# Altium PCB LED_RGBSwitch_AD.pcbdoc
Units mil, origin at the board's own origin, x right, y up, seen from the top; angles counter-clockwise.
Board outline 7770 x 7965 mil, 2 copper layers (Top Layer, Bottom Layer); 140 components, 163 nets, 579 pads, 138 vias.
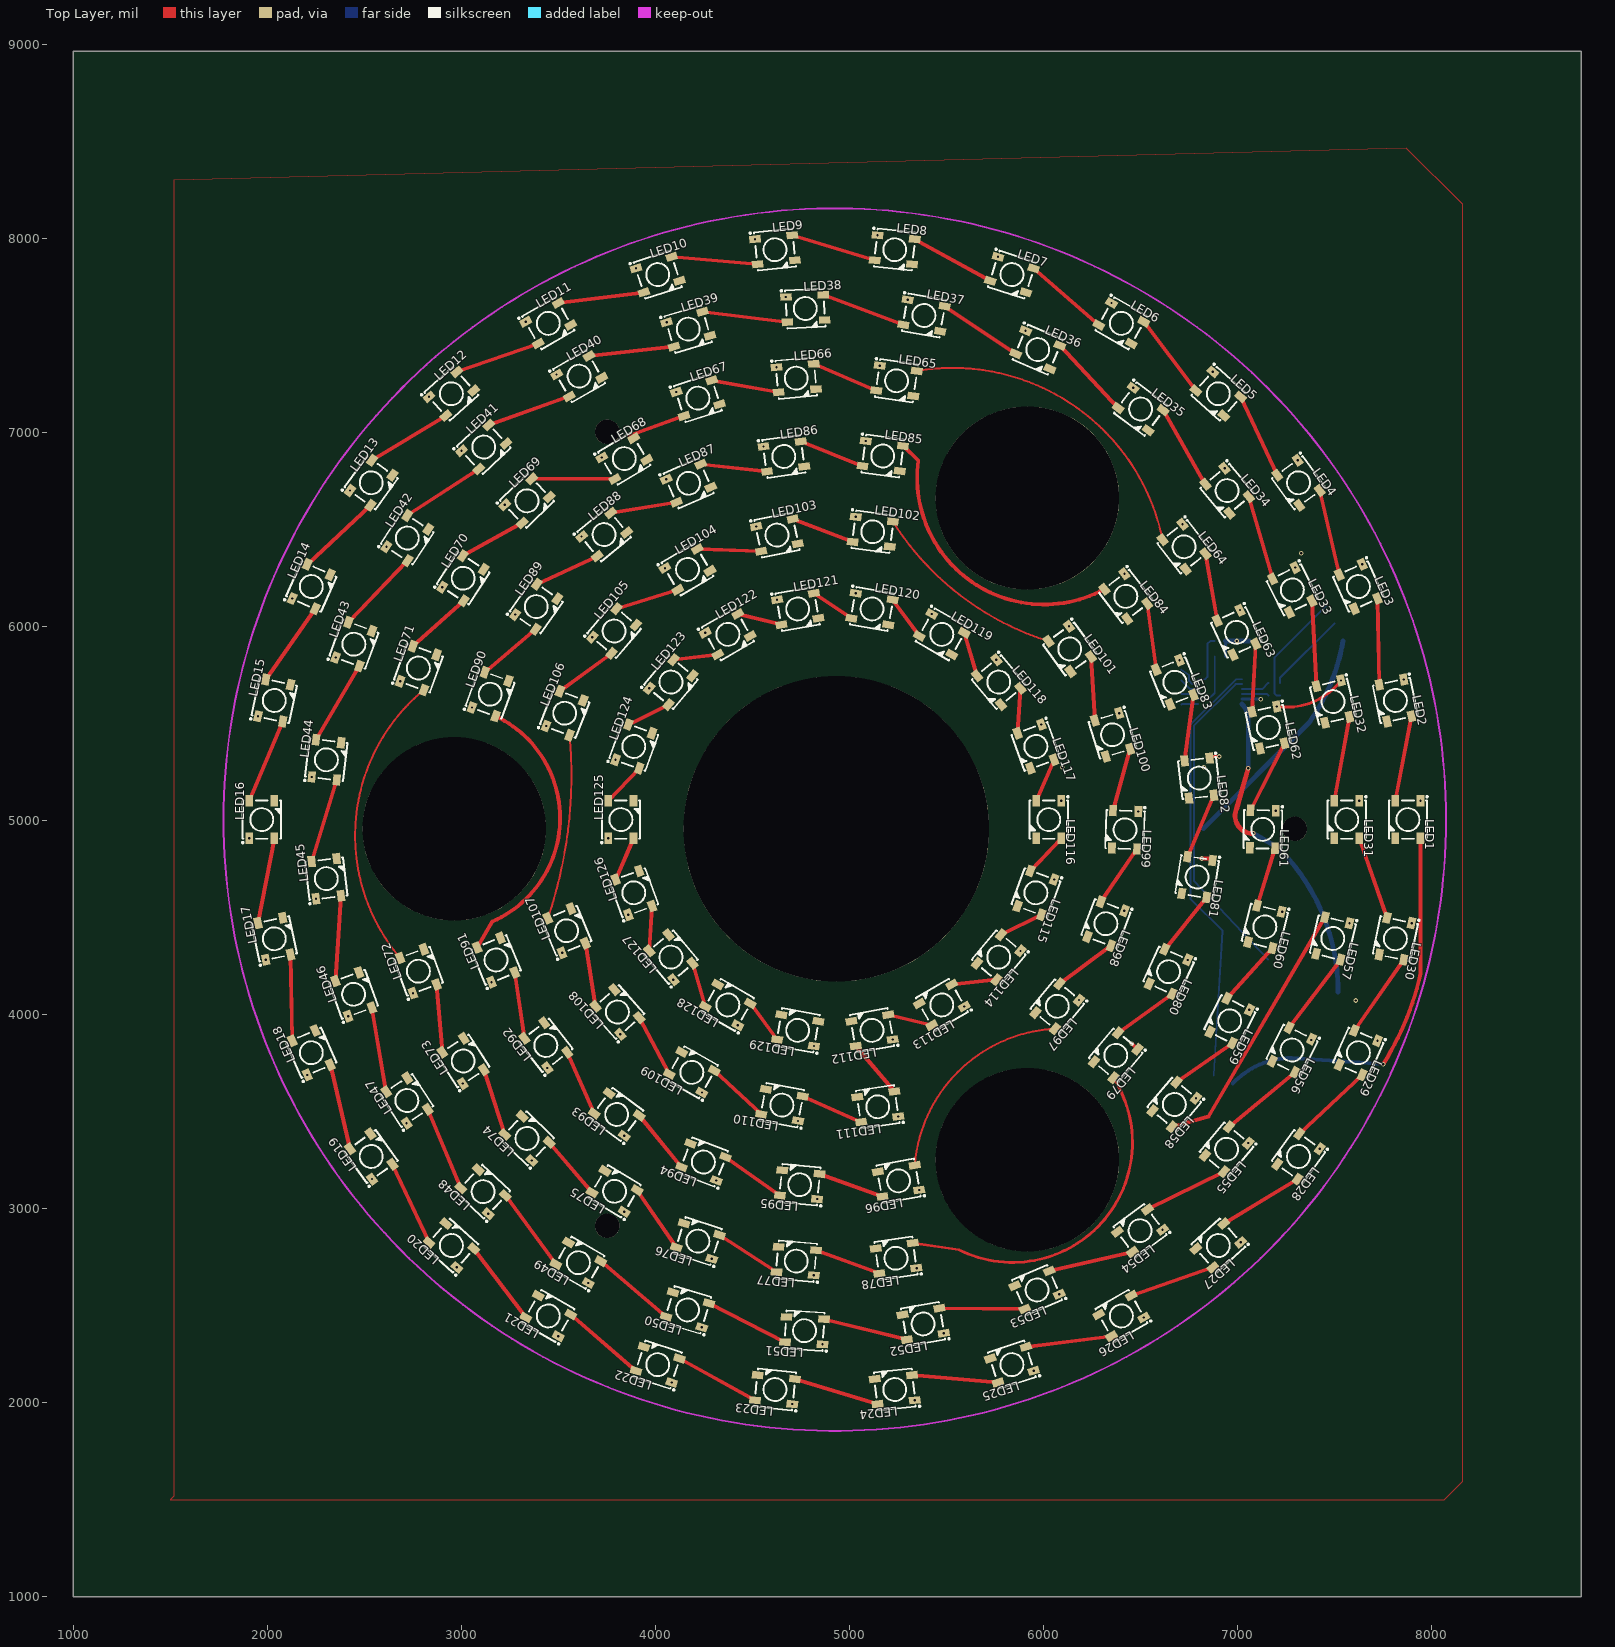
[diagram p0: Top Layer view]
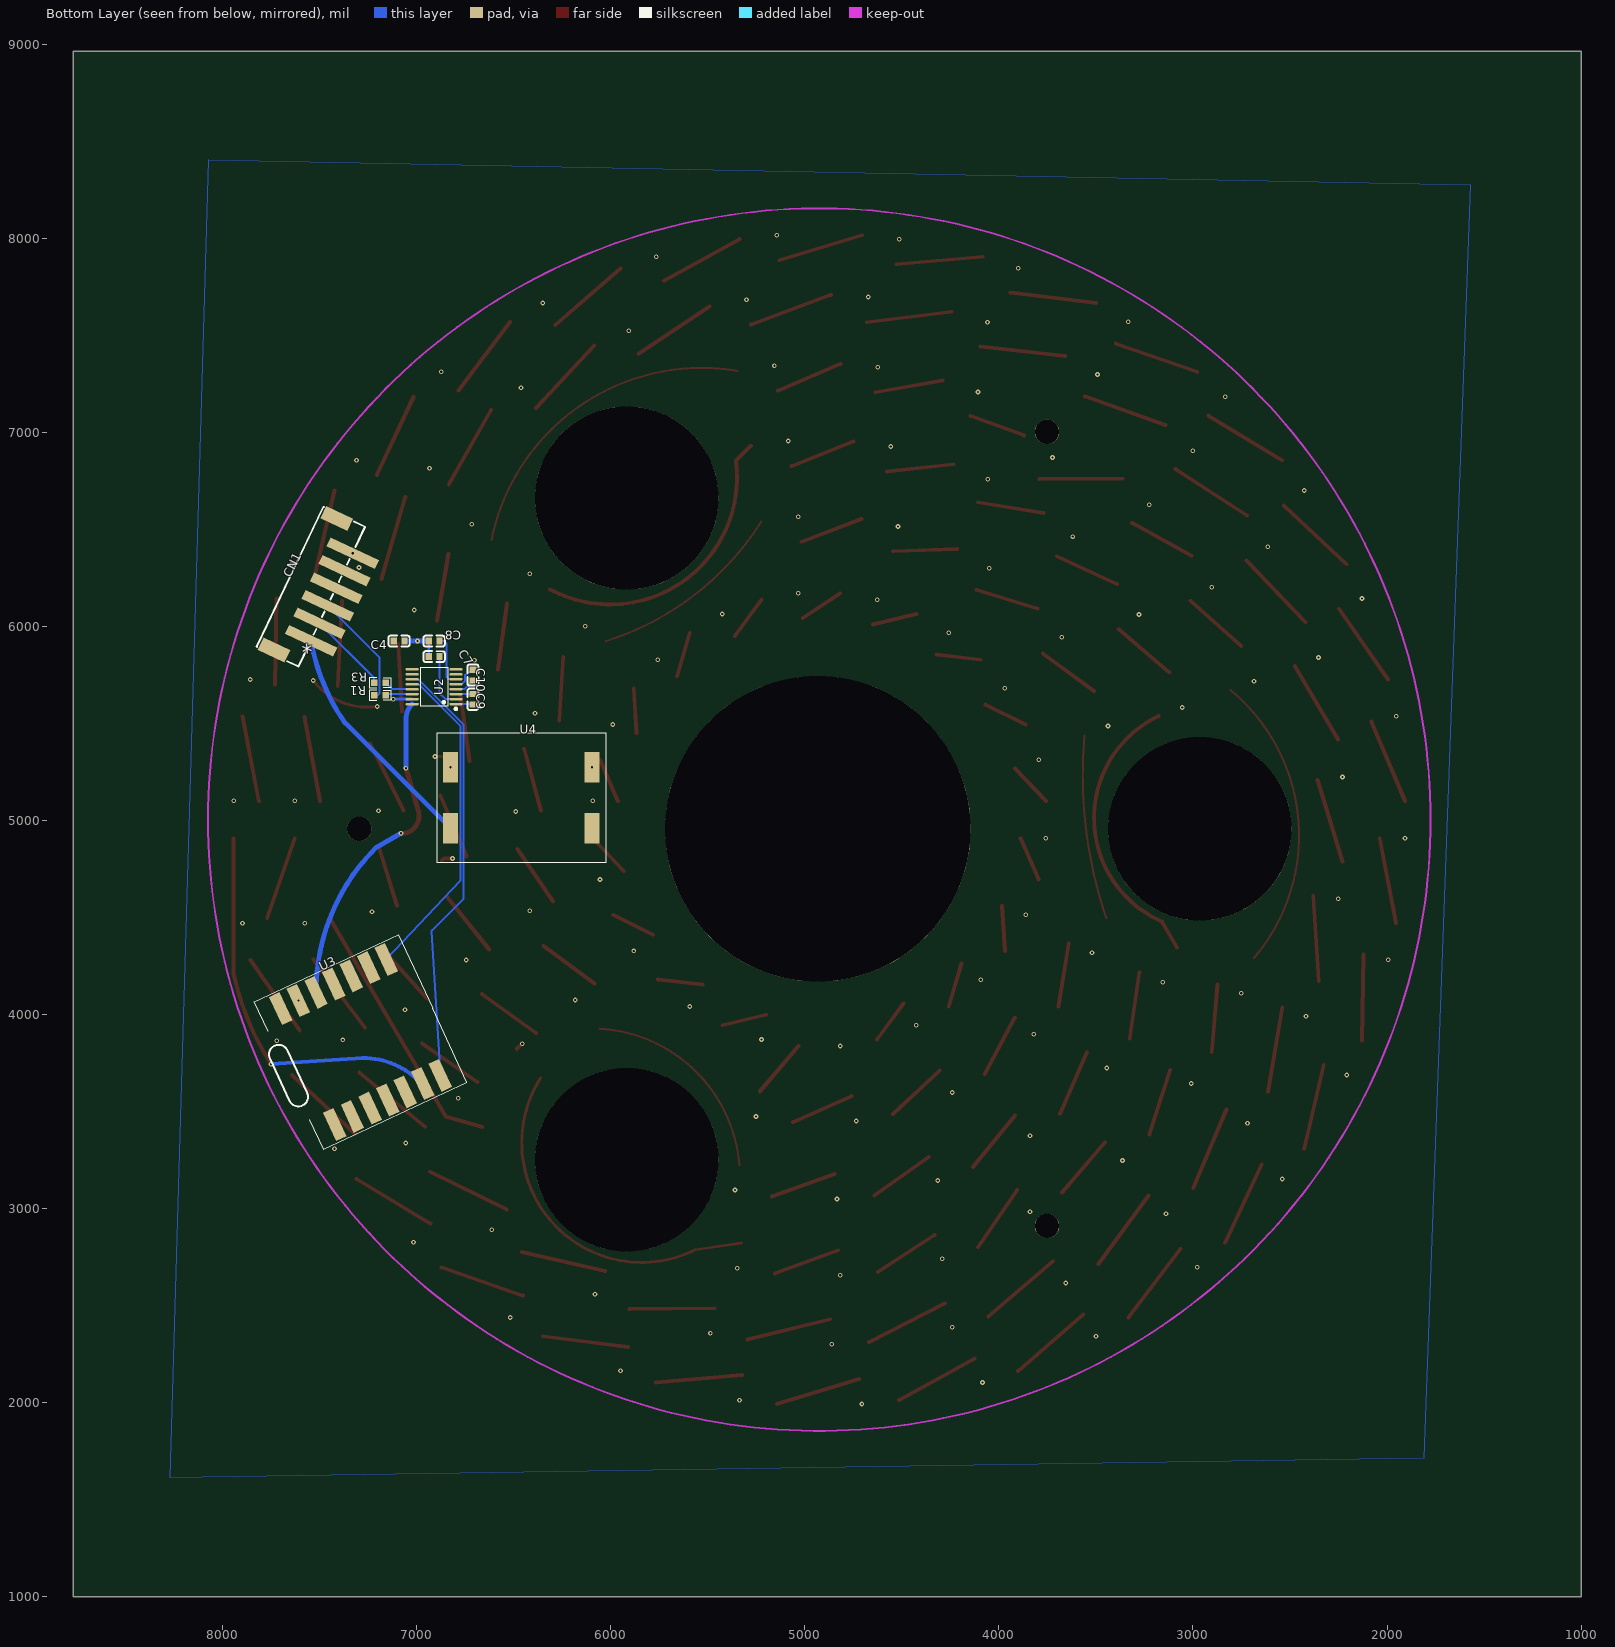
[diagram p1: Bottom Layer view, seen from below]

## Layer stack, top to bottom
Top Layer: signal copper (thickness not stored)
Dielectric: dielectric 12.6, FR-4, Dk 4.8
Bottom Layer: signal copper (thickness not stored)

## Board outline
8770,1000 1000,1000 1000,8965 8770,8965

## Components (designator, comment, footprint, x,y, rotation, side; value= is the part's Value field where it differs from the comment)
C4 "1u" C0603 7090,5925 r0 bottom
C7 "1u" C0603 6910,5845 r180 bottom
C8 "1u" C0603 6910,5925 r180 bottom
C9 "1u" C0603 6710,5625 r90 bottom
C10 "1u" C0603 6710,5750 r90 bottom
CN1 "XH2.54-6AB" CONN-SMD_6P-P2.54_XH2.54-6AB 7504.37,6184.96 r295.5 bottom
LED1 "WS2812B-B" LED-SMD_4P-L5.0-W5.0-TL_WS2812B-B 7877.76,5005 r270 top
LED2 "WS2812B-B" LED-SMD_4P-L5.0-W5.0-TL_WS2812B-B 7813.23,5618.91 r282 top
LED3 "WS2812B-B" LED-SMD_4P-L5.0-W5.0-TL_WS2812B-B 7622.48,6205.99 r294 top
LED4 "WS2812B-B" LED-SMD_4P-L5.0-W5.0-TL_WS2812B-B 7313.83,6740.59 r306 top
LED5 "WS2812B-B" LED-SMD_4P-L5.0-W5.0-TL_WS2812B-B 6900.78,7199.32 r318 top
LED6 "WS2812B-B" LED-SMD_4P-L5.0-W5.0-TL_WS2812B-B 6401.38,7562.16 r330 top
LED7 "WS2812B-B" LED-SMD_4P-L5.0-W5.0-TL_WS2812B-B 5837.45,7813.24 r342 top
LED8 "WS2812B-B" LED-SMD_4P-L5.0-W5.0-TL_WS2812B-B 5233.65,7941.58 r354 top
LED9 "WS2812B-B" LED-SMD_4P-L5.0-W5.0-TL_WS2812B-B 4616.35,7941.58 r6 top
LED10 "WS2812B-B" LED-SMD_4P-L5.0-W5.0-TL_WS2812B-B 4012.55,7813.24 r18 top
LED11 "WS2812B-B" LED-SMD_4P-L5.0-W5.0-TL_WS2812B-B 3448.62,7562.16 r30 top
LED12 "WS2812B-B" LED-SMD_4P-L5.0-W5.0-TL_WS2812B-B 2949.22,7199.32 r42 top
LED13 "WS2812B-B" LED-SMD_4P-L5.0-W5.0-TL_WS2812B-B 2536.17,6740.59 r54 top
LED14 "WS2812B-B" LED-SMD_4P-L5.0-W5.0-TL_WS2812B-B 2227.52,6205.99 r66 top
LED15 "WS2812B-B" LED-SMD_4P-L5.0-W5.0-TL_WS2812B-B 2036.77,5618.91 r78 top
LED16 "WS2812B-B" LED-SMD_4P-L5.0-W5.0-TL_WS2812B-B 1972.24,5005 r90 top
LED17 "WS2812B-B" LED-SMD_4P-L5.0-W5.0-TL_WS2812B-B 2036.77,4391.09 r102 top
LED18 "WS2812B-B" LED-SMD_4P-L5.0-W5.0-TL_WS2812B-B 2227.52,3804.01 r114 top
LED19 "WS2812B-B" LED-SMD_4P-L5.0-W5.0-TL_WS2812B-B 2536.17,3269.41 r126 top
LED20 "WS2812B-B" LED-SMD_4P-L5.0-W5.0-TL_WS2812B-B 2949.22,2810.68 r138 top
LED21 "WS2812B-B" LED-SMD_4P-L5.0-W5.0-TL_WS2812B-B 3448.62,2447.84 r150 top
LED22 "WS2812B-B" LED-SMD_4P-L5.0-W5.0-TL_WS2812B-B 4012.55,2196.76 r162 top
LED23 "WS2812B-B" LED-SMD_4P-L5.0-W5.0-TL_WS2812B-B 4616.35,2068.42 r174 top
LED24 "WS2812B-B" LED-SMD_4P-L5.0-W5.0-TL_WS2812B-B 5233.65,2068.42 r186 top
LED25 "WS2812B-B" LED-SMD_4P-L5.0-W5.0-TL_WS2812B-B 5837.45,2196.76 r198 top
LED26 "WS2812B-B" LED-SMD_4P-L5.0-W5.0-TL_WS2812B-B 6401.38,2447.84 r210 top
LED27 "WS2812B-B" LED-SMD_4P-L5.0-W5.0-TL_WS2812B-B 6900.78,2810.68 r222 top
LED28 "WS2812B-B" LED-SMD_4P-L5.0-W5.0-TL_WS2812B-B 7313.83,3269.41 r234 top
LED29 "WS2812B-B" LED-SMD_4P-L5.0-W5.0-TL_WS2812B-B 7622.48,3804.01 r246 top
LED30 "WS2812B-B" LED-SMD_4P-L5.0-W5.0-TL_WS2812B-B 7813.23,4391.09 r258 top
LED31 "WS2812B-B" LED-SMD_4P-L5.0-W5.0-TL_WS2812B-B 7562.8,5005 r270 top
LED32 "WS2812B-B" LED-SMD_4P-L5.0-W5.0-TL_WS2812B-B 7491.73,5613.17 r283.33 top
LED33 "WS2812B-B" LED-SMD_4P-L5.0-W5.0-TL_WS2812B-B 7282.36,6188.57 r296.66 top
LED34 "WS2812B-B" LED-SMD_4P-L5.0-W5.0-TL_WS2812B-B 6945.96,6700.19 r309.99 top
LED35 "WS2812B-B" LED-SMD_4P-L5.0-W5.0-TL_WS2812B-B 6500.67,7120.47 r323.32 top
LED36 "WS2812B-B" LED-SMD_4P-L5.0-W5.0-TL_WS2812B-B 5970.48,7426.76 r336.65 top
LED37 "WS2812B-B" LED-SMD_4P-L5.0-W5.0-TL_WS2812B-B 5383.95,7602.56 r349.98 top
LED38 "WS2812B-B" LED-SMD_4P-L5.0-W5.0-TL_WS2812B-B 4772.7,7638.4 r3.31 top
LED39 "WS2812B-B" LED-SMD_4P-L5.0-W5.0-TL_WS2812B-B 4169.65,7532.33 r16.64 top
LED40 "WS2812B-B" LED-SMD_4P-L5.0-W5.0-TL_WS2812B-B 3607.3,7290.09 r29.97 top
LED41 "WS2812B-B" LED-SMD_4P-L5.0-W5.0-TL_WS2812B-B 3115.95,6924.72 r43.3 top
LED42 "WS2812B-B" LED-SMD_4P-L5.0-W5.0-TL_WS2812B-B 2722.08,6455.9 r56.63 top
LED43 "WS2812B-B" LED-SMD_4P-L5.0-W5.0-TL_WS2812B-B 2446.91,5908.91 r69.96 top
LED44 "WS2812B-B" LED-SMD_4P-L5.0-W5.0-TL_WS2812B-B 2305.27,5313.21 r83.29 top
LED45 "WS2812B-B" LED-SMD_4P-L5.0-W5.0-TL_WS2812B-B 2304.79,4700.9 r96.62 top
LED46 "WS2812B-B" LED-SMD_4P-L5.0-W5.0-TL_WS2812B-B 2445.5,4104.98 r109.95 top
LED47 "WS2812B-B" LED-SMD_4P-L5.0-W5.0-TL_WS2812B-B 2719.81,3557.56 r123.28 top
LED48 "WS2812B-B" LED-SMD_4P-L5.0-W5.0-TL_WS2812B-B 3112.94,3088.13 r136.61 top
LED49 "WS2812B-B" LED-SMD_4P-L5.0-W5.0-TL_WS2812B-B 3603.71,2721.99 r149.94 top
LED50 "WS2812B-B" LED-SMD_4P-L5.0-W5.0-TL_WS2812B-B 4165.68,2478.86 r163.27 top
LED51 "WS2812B-B" LED-SMD_4P-L5.0-W5.0-TL_WS2812B-B 4768.56,2371.85 r176.6 top
LED52 "WS2812B-B" LED-SMD_4P-L5.0-W5.0-TL_WS2812B-B 5379.87,2406.72 r189.93 top
LED53 "WS2812B-B" LED-SMD_4P-L5.0-W5.0-TL_WS2812B-B 5966.68,2581.6 r203.26 top
LED54 "WS2812B-B" LED-SMD_4P-L5.0-W5.0-TL_WS2812B-B 6497.35,2887.06 r216.59 top
LED55 "WS2812B-B" LED-SMD_4P-L5.0-W5.0-TL_WS2812B-B 6943.3,3306.64 r229.92 top
LED56 "WS2812B-B" LED-SMD_4P-L5.0-W5.0-TL_WS2812B-B 7280.5,3817.73 r243.25 top
LED57 "WS2812B-B" LED-SMD_4P-L5.0-W5.0-TL_WS2812B-B 7490.77,4392.8 r256.58 top
LED58 "WS2812B-B" LED-SMD_4P-L5.0-W5.0-TL_WS2812B-B 6674.23,3537.22 r230 top
LED59 "WS2812B-B" LED-SMD_4P-L5.0-W5.0-TL_WS2812B-B 6959.58,3968.33 r243 top
LED60 "WS2812B-B" LED-SMD_4P-L5.0-W5.0-TL_WS2812B-B 7140.64,4452.58 r256 top
LED61 "WS2812B-B" LED-SMD_4P-L5.0-W5.0-TL_WS2812B-B 7130,4955 r269 top
LED62 "WS2812B-B" LED-SMD_4P-L5.0-W5.0-TL_WS2812B-B 7158.56,5479.76 r282 top
LED63 "WS2812B-B" LED-SMD_4P-L5.0-W5.0-TL_WS2812B-B 6994.52,5970.03 r295 top
LED64 "WS2812B-B" LED-SMD_4P-L5.0-W5.0-TL_WS2812B-B 6724.4,6410.84 r308 top
LED65 "WS2812B-B" LED-SMD_4P-L5.0-W5.0-TL_WS2812B-B 5242.8,7266.24 r352 top
LED66 "WS2812B-B" LED-SMD_4P-L5.0-W5.0-TL_WS2812B-B 4725.98,7279.77 r5 top
LED67 "WS2812B-B" LED-SMD_4P-L5.0-W5.0-TL_WS2812B-B 4219.37,7176.7 r18 top
LED68 "WS2812B-B" LED-SMD_4P-L5.0-W5.0-TL_WS2812B-B 3840,6865 r31 top
LED69 "WS2812B-B" LED-SMD_4P-L5.0-W5.0-TL_WS2812B-B 3338.77,6647.59 r44 top
LED70 "WS2812B-B" LED-SMD_4P-L5.0-W5.0-TL_WS2812B-B 3009.93,6248.66 r57 top
LED71 "WS2812B-B" LED-SMD_4P-L5.0-W5.0-TL_WS2812B-B 2779.24,5785.99 r70 top
LED72 "WS2812B-B" LED-SMD_4P-L5.0-W5.0-TL_WS2812B-B 2779.24,4224.01 r110 top
LED73 "WS2812B-B" LED-SMD_4P-L5.0-W5.0-TL_WS2812B-B 3009.93,3761.34 r123 top
LED74 "WS2812B-B" LED-SMD_4P-L5.0-W5.0-TL_WS2812B-B 3338.77,3362.41 r136 top
LED75 "WS2812B-B" LED-SMD_4P-L5.0-W5.0-TL_WS2812B-B 3790,3090 r149 top
LED76 "WS2812B-B" LED-SMD_4P-L5.0-W5.0-TL_WS2812B-B 4219.37,2833.3 r162 top
LED77 "WS2812B-B" LED-SMD_4P-L5.0-W5.0-TL_WS2812B-B 4725.98,2730.22 r175 top
LED78 "WS2812B-B" LED-SMD_4P-L5.0-W5.0-TL_WS2812B-B 5240,2745 r188 top
LED79 "WS2812B-B" LED-SMD_4P-L5.0-W5.0-TL_WS2812B-B 6372.64,3790.28 r230 top
LED80 "WS2812B-B" LED-SMD_4P-L5.0-W5.0-TL_WS2812B-B 6644.61,4221.33 r245.5 top
LED81 "WS2812B-B" LED-SMD_4P-L5.0-W5.0-TL_WS2812B-B 6791.5,4709.38 r261 top
LED82 "WS2812B-B" LED-SMD_4P-L5.0-W5.0-TL_WS2812B-B 6802.62,5218.93 r276.5 top
LED83 "WS2812B-B" LED-SMD_4P-L5.0-W5.0-TL_WS2812B-B 6677.16,5712.92 r292 top
LED84 "WS2812B-B" LED-SMD_4P-L5.0-W5.0-TL_WS2812B-B 6424.25,6155.41 r307.5 top
LED85 "WS2812B-B" LED-SMD_4P-L5.0-W5.0-TL_WS2812B-B 5171.66,6878.6 r352.5 top
LED86 "WS2812B-B" LED-SMD_4P-L5.0-W5.0-TL_WS2812B-B 4662,6876.37 r8 top
LED87 "WS2812B-B" LED-SMD_4P-L5.0-W5.0-TL_WS2812B-B 4171.46,6738.03 r23.5 top
LED88 "WS2812B-B" LED-SMD_4P-L5.0-W5.0-TL_WS2812B-B 3735.73,6473.62 r39 top
LED89 "WS2812B-B" LED-SMD_4P-L5.0-W5.0-TL_WS2812B-B 3386.51,6102.39 r54.5 top
LED90 "WS2812B-B" LED-SMD_4P-L5.0-W5.0-TL_WS2812B-B 3149.2,5651.34 r70 top
LED91 "WS2812B-B" LED-SMD_4P-L5.0-W5.0-TL_WS2812B-B 3179.09,4281.82 r112.5 top
LED92 "WS2812B-B" LED-SMD_4P-L5.0-W5.0-TL_WS2812B-B 3435.85,3841.55 r128 top
LED93 "WS2812B-B" LED-SMD_4P-L5.0-W5.0-TL_WS2812B-B 3800.93,3485.9 r143.5 top
LED94 "WS2812B-B" LED-SMD_4P-L5.0-W5.0-TL_WS2812B-B 4247.77,3240.75 r159 top
LED95 "WS2812B-B" LED-SMD_4P-L5.0-W5.0-TL_WS2812B-B 4743.87,3123.94 r174.5 top
LED96 "WS2812B-B" LED-SMD_4P-L5.0-W5.0-TL_WS2812B-B 5253.15,3143.95 r190 top
LED97 "WS2812B-B" LED-SMD_4P-L5.0-W5.0-TL_WS2812B-B 6071.05,4043.35 r230 top
LED98 "WS2812B-B" LED-SMD_4P-L5.0-W5.0-TL_WS2812B-B 6321.69,4468.86 r249 top
LED99 "WS2812B-B" LED-SMD_4P-L5.0-W5.0-TL_WS2812B-B 6420.15,4952.79 r268 top
LED100 "WS2812B-B" LED-SMD_4P-L5.0-W5.0-TL_WS2812B-B 6355.69,5442.41 r287 top
LED101 "WS2812B-B" LED-SMD_4P-L5.0-W5.0-TL_WS2812B-B 6135.34,5884.36 r306 top
LED102 "WS2812B-B" LED-SMD_4P-L5.0-W5.0-TL_WS2812B-B 5120.27,6488.26 r352.5 top
LED103 "WS2812B-B" LED-SMD_4P-L5.0-W5.0-TL_WS2812B-B 4626.73,6471.03 r11.5 top
LED104 "WS2812B-B" LED-SMD_4P-L5.0-W5.0-TL_WS2812B-B 4165.69,6294.05 r30.5 top
LED105 "WS2812B-B" LED-SMD_4P-L5.0-W5.0-TL_WS2812B-B 3787.39,5976.61 r49.5 top
LED106 "WS2812B-B" LED-SMD_4P-L5.0-W5.0-TL_WS2812B-B 3533.04,5553.31 r68.5 top
LED107 "WS2812B-B" LED-SMD_4P-L5.0-W5.0-TL_WS2812B-B 3542.82,4432.48 r112.5 top
LED108 "WS2812B-B" LED-SMD_4P-L5.0-W5.0-TL_WS2812B-B 3804.51,4013.68 r131.5 top
LED109 "WS2812B-B" LED-SMD_4P-L5.0-W5.0-TL_WS2812B-B 4188.3,3702.89 r150.5 top
LED110 "WS2812B-B" LED-SMD_4P-L5.0-W5.0-TL_WS2812B-B 4652.36,3533.99 r169.5 top
LED111 "WS2812B-B" LED-SMD_4P-L5.0-W5.0-TL_WS2812B-B 5146.13,3525.37 r188.5 top
LED112 "WS2812B-B" LED-SMD_4P-L5.0-W5.0-TL_WS2812B-B 5116.42,3919.39 r190 top
LED113 "WS2812B-B" LED-SMD_4P-L5.0-W5.0-TL_WS2812B-B 5476.18,4050.33 r210 top
LED114 "WS2812B-B" LED-SMD_4P-L5.0-W5.0-TL_WS2812B-B 5769.46,4296.41 r230 top
LED115 "WS2812B-B" LED-SMD_4P-L5.0-W5.0-TL_WS2812B-B 5960.88,4627.97 r250 top
LED116 "WS2812B-B" LED-SMD_4P-L5.0-W5.0-TL_WS2812B-B 6027.36,5005 r270 top
LED117 "WS2812B-B" LED-SMD_4P-L5.0-W5.0-TL_WS2812B-B 5960.88,5382.03 r290 top
LED118 "WS2812B-B" LED-SMD_4P-L5.0-W5.0-TL_WS2812B-B 5769.46,5713.59 r310 top
LED119 "WS2812B-B" LED-SMD_4P-L5.0-W5.0-TL_WS2812B-B 5476.18,5959.67 r330 top
LED120 "WS2812B-B" LED-SMD_4P-L5.0-W5.0-TL_WS2812B-B 5116.42,6090.61 r350 top
LED121 "WS2812B-B" LED-SMD_4P-L5.0-W5.0-TL_WS2812B-B 4733.58,6090.61 r10 top
LED122 "WS2812B-B" LED-SMD_4P-L5.0-W5.0-TL_WS2812B-B 4373.82,5959.67 r30 top
LED123 "WS2812B-B" LED-SMD_4P-L5.0-W5.0-TL_WS2812B-B 4080.54,5713.59 r50 top
LED124 "WS2812B-B" LED-SMD_4P-L5.0-W5.0-TL_WS2812B-B 3889.12,5382.03 r70 top
LED125 "WS2812B-B" LED-SMD_4P-L5.0-W5.0-TL_WS2812B-B 3822.64,5005 r90 top
LED126 "WS2812B-B" LED-SMD_4P-L5.0-W5.0-TL_WS2812B-B 3889.12,4627.97 r110 top
LED127 "WS2812B-B" LED-SMD_4P-L5.0-W5.0-TL_WS2812B-B 4080.54,4296.41 r130 top
LED128 "WS2812B-B" LED-SMD_4P-L5.0-W5.0-TL_WS2812B-B 4373.82,4050.33 r150 top
LED129 "WS2812B-B" LED-SMD_4P-L5.0-W5.0-TL_WS2812B-B 4733.58,3919.39 r170 top
R1 "33R" R0603 7188.75,5645 r180 bottom
R3 "33R" R0603 7188.75,5710 r180 bottom
U2 "SP3232EEY-L" TSSOP-16_L5.0-W4.4-P0.65-LS6.4-BL 6910,5690 r270 bottom
U3 "seeeduinoxiao" SEEEDUINOXIAO 7288.4,3859.19 r335 bottom
U4 "MP1584EN-MK" MP1584EN-MK 6825,4960 r0 bottom

## Footprints (in the part's own frame and the unit in brackets; to place one, negate y for a bottom-side part, rotate by r counter-clockwise, add the part's x,y. Pads: shape width x height; smd on the part's side, far side on the other; paste and mask are expansions set on the pad)
C0603 [mm]
  rect 0.8x0.9 smd: 1(0.7,0) 2(-0.7,0)
  silkscreen extent -1.39,-0.72 1.41,0.71
CONN-SMD_6P-P2.54_XH2.54-6AB [mm]
  rect 1.3x7 smd: 1(6.35,1.925) 2(3.81,1.925) 3(1.27,1.925) 4(-1.27,1.925) 5(-3.81,1.925) 6(-6.35,1.925)
  rect 1.8x3.9 smd: 7(9.551,-1.925) 8(-9.551,-1.925)
  silkscreen extent -10.16,-4.18 10.12,1.89
LED-SMD_4P-L5.0-W5.0-TL_WS2812B-B [mm]
  rect 1.5x1 smd: 1(-2.45,1.65) 2(-2.45,-1.65) 3(2.45,-1.65) 4(2.45,1.65)
  silkscreen extent -3.1,-2.5 2.5,2.6
MP1584EN-MK [mm]
  rect 2x4 smd: 1(0,-8) 2(0,0) 3(-18.5,0) 4(-18.5,-8)
  silkscreen extent -20.29,-12.51 1.71,4.49
R0603 [mil]
  rect 31.75x34.02 smd: 1(29.65,0) 2(-29.65,0)
  silkscreen extent -55,-26 55,26
SEEEDUINOXIAO [mm]
  rect 1.5x4.089 smd: 1(7.62,8.369) 2(5.08,8.369) 3(2.54,8.369) 4(0,8.369) 5(-2.54,8.369) 6(-5.08,8.369) 7(-7.62,8.369) 8(-7.62,-8.369) 9(-5.08,-8.369) 10(-2.54,-8.369) 11(0,-8.369) 12(2.54,-8.369) 13(5.08,-8.369) 14(7.62,-8.369)
  silkscreen extent -10.41,-10.64 11.68,10.64
TSSOP-16_L5.0-W4.4-P0.65-LS6.4-BL [mm]
  oval 0.343x1.731 smd: 1(2.275,2.866) 2(1.625,2.866) 3(0.975,2.866) 4(0.325,2.866) 5(-0.325,2.866) 6(-0.975,2.866) 7(-1.625,2.866) 8(-2.275,2.866) 9(-2.275,-2.866) 10(-1.625,-2.866) 11(-0.975,-2.866) 12(-0.325,-2.866) 13(0.325,-2.866) 14(0.975,-2.866) 15(1.625,-2.866) 16(2.275,-2.866)
  silkscreen extent -2.58,-1.77 3.05,3.02

## Free pads (board coordinates)
  round 944.88 hole 944.88 unplated: ""(2964.37,4957.31) ""(5917.12,3252.53) ""(5917.12,6662.08)
  round 125.98 hole 125.98 unplated: ""(3751.77,2911.58) ""(3751.77,7003.04) ""(7295.08,4957.31)
  round 1574.8 hole 1574.8 unplated: ""(4932.87,4957.31)

## Via types
v1: diameter 24, hole 12, Top Layer to Bottom Layer, tented both sides, 138 vias

## Nets (pads, with @x,y where several pads share a name; then routed paths per layer and width w, separated by ;. In a path a pad name is that pad's centre, name@x,y a point inside that pad or via, vN(x,y) a via of type N, cw(c..) or ccw(c..) an arc to the next point about the centre after c; other vN are vias at no path point)
3V3: U2.16 U3.12 | length 1715.6
  Top Layer w25: v1(7055,5270) 6994.32,5060.28 ccw(c7079.52,5025.16) v1@7080.01,4933
  Bottom Layer w25: U2.16 cw(c6945.16,5522.76) 7055,5522.77 v1(7055,5270) ; v1(7080,4935) 7209.9,4860.1 cw(c6465.34,4115.57) U3.12
5: LED1.4 U3.6 | length 2017.5
  Top Layer w20: v1(7750,3745) ccw(c6512.64,4530.08) 7942.72,4210.27 LED1.4@7942.72,4908.55
  Bottom Layer w20: U3.6@6975,3645 cw(c7277.89,3363.8) 7277.89,3777.1 v1(7750,3745)
5V: C4.1 LED1.1 LED2.1 LED3.1 LED4.1 LED5.1 LED6.1 LED7.1 LED8.1 LED9.1 LED10.1 LED11.1 LED12.1 LED13.1 LED14.1 LED15.1 LED16.1 LED17.1 LED18.1 LED19.1 LED20.1 LED21.1 LED22.1 LED23.1 LED24.1 LED25.1 LED26.1 LED27.1 LED28.1 LED29.1 LED30.1 LED31.1 LED32.1 LED33.1 LED34.1 LED35.1 LED36.1 LED37.1 LED38.1 LED39.1 LED40.1 LED41.1 LED42.1 LED43.1 LED44.1 LED45.1 LED46.1 LED47.1 LED48.1 LED49.1 LED50.1 LED51.1 LED52.1 LED53.1 LED54.1 LED55.1 LED56.1 LED57.1 LED58.1 LED59.1 LED60.1 LED61.1 LED62.1 LED63.1 LED64.1 LED65.1 LED66.1 LED67.1 LED68.1 LED69.1 LED70.1 LED71.1 LED72.1 LED73.1 LED74.1 LED75.1 LED76.1 LED77.1 LED78.1 LED79.1 LED80.1 LED81.1 LED82.1 LED83.1 LED84.1 LED85.1 LED86.1 LED87.1 LED88.1 LED89.1 LED90.1 LED91.1 LED92.1 LED93.1 LED94.1 LED95.1 LED96.1 LED97.1 LED98.1 LED99.1 LED100.1 LED101.1 LED102.1 LED103.1 LED104.1 LED105.1 LED106.1 LED107.1 LED108.1 LED109.1 LED110.1 LED111.1 LED112.1 LED113.1 LED114.1 LED115.1 LED116.1 LED117.1 LED118.1 LED119.1 LED120.1 LED121.1 LED122.1 LED123.1 LED124.1 LED125.1 LED126.1 LED127.1 LED128.1 LED129.1 U3.14 U4.3 | length 527.2
  Top Layer w15: LED82.1 cw(c6875.26,5303.1) 6875.26,5330 v1(6905,5330) ; v1(7202.05,5587.62) 7208.25,5587.62 ccw(c7254.4,5935.04) v1(7532.7,5722.01)
  Top Layer w19.68: v1(6455,3850) 6456.83,3850 LED79.1 ; v1(6815,4805) 6860.23,4805 LED81.1 ; v1(7060,4025) 7061.04,4025 LED59.1
  other v1: 4705.49,1993.73 5336.37,2013.9 4084.21,2105.17 5949.26,2164.79 4861,2301.28 3499.68,2343.35 5486.09,2359.37 4239.35,2388.88 6517.4,2439.81 6080.95,2560.01 3654.66,2617.44 4816.41,2657.1 5347.36,2692.85 2977.44,2697.85 4291.03,2741.7 7015.93,2826.94 6613.52,2892.39 3138.41,2974.66 3839.22,2984.64 4833.66,3050.03 5359.43,3096.72 4314.54,3145.54 2540.31,3153.19 3363.03,3248.68 7423.08,3309.27 7055.11,3338.62 3839.82,3376.3 2718.43,3441.27 4735.37,3452.53 5251.13,3475.38 6786,3569.35 4240.27,3598.85 3007.98,3645.06 2207.41,3689.46 3444.04,3725.54 4817.29,3838.66 7721.06,3865.7 7380,3870 5222.7,3872.16 3819.78,3898.39 4424.87,3945.84 2417.34,3992.15 5592.2,4042.29 6182.82,4075.48 2751.19,4111.15 3155.98,4167.84 4092.78,4180.77 6743.73,4282.16 1993.28,4283.23 3519.71,4318.5 5881.22,4328.55 7576.35,4471.55 7896.83,4471.93 3861.06,4515.11 7230,4530 6416.91,4535.63 2251.38,4597.6 6054.92,4696.39 1907.28,4908.54 3757.68,4908.54 6488.44,5046.92 7196.64,5050.31 6092.33,5101.46 7627.76,5101.46 7942.72,5101.46 2229.48,5225 3795.08,5313.61 3437.24,5487.37 5988.94,5494.89 1953.17,5538.07 6389.61,5553.64 3055.17,5582.91 3968.78,5681.45 2685.21,5717.57 7856.72,5726.77 6701.26,5826.69 5757.22,5829.23 2352.83,5840.55 3675.34,5945.46 4257.8,5967.7 6131.2,6000.58 3277.61,6061.59 5425.13,6064.16 7012.63,6084.91 4627.3,6137.84 2128.94,6144.3 5032.71,6171.34 2902.91,6203.15 6417.07,6271.49 4049.61,6301.07 7297.13,6303.92 7642.59,6320.54 2614.77,6411.08 3619.89,6463.4 4519.26,6515.46 6716.2,6526.85 5033.12,6565.26 3224.26,6627.31 2426.92,6700.73 4057.1,6759.14 6933.75,6815.84 7309.69,6856.81 3723.86,6871 3001.2,6905.84 4557.43,6927.28 5084.51,6955.59 2834.07,7183.06 4107.56,7208.68 6462.12,7230.19 3491.29,7298.18 6872.56,7312.15 4624.23,7336.08 5156.32,7344 5907.67,7524.64 4058.63,7566.95 3332.6,7570.19 6350.32,7666.65 5300.27,7683.32 4672.65,7697.68 3900.74,7845.21 5765.79,7904.83 4513.63,7996.1 5144.51,8016.27
C7_1: C7.1 U2.2 | length 286.7
  Bottom Layer w10: U2.2 6848.98,5626.02 6850,5625 6882.44,5657.44 C7.1
C8_1: C8.1 U2.6 | length 266.3
  Bottom Layer w10: U2.6 6833.39,5728.39 6845,5740 6845,5910 6860,5925 C8.1
C9_1: C9.1 U2.3 | length 87.2
  Bottom Layer w10: C9.1 U2.3
C9_2: C9.2 U2.1 | length 88.4
  Bottom Layer w10: C9.2 6712.99,5600.43 U2.1
C10_1: C10.1 U2.5 | length 132.9
  Bottom Layer w10: C10.1 6750,5750 6750,5720 6767.2,5702.8 U2.5
C10_2: C10.2 U2.4 | length 105.9
  Bottom Layer w10: C10.2 6755.23,5677.21 U2.4
CN1_4: CN1.4
CN1_5: CN1.5
CN1_7: CN1.7
CN1_8: CN1.8
GND: C4.2 C7.2 C8.2 CN1.6 LED1.3 LED2.3 LED3.3 LED4.3 LED5.3 LED6.3 LED7.3 LED8.3 LED9.3 LED10.3 LED11.3 LED12.3 LED13.3 LED14.3 LED15.3 LED16.3 LED17.3 LED18.3 LED19.3 LED20.3 LED21.3 LED22.3 LED23.3 LED24.3 LED25.3 LED26.3 LED27.3 LED28.3 LED29.3 LED30.3 LED31.3 LED32.3 LED33.3 LED34.3 LED35.3 LED36.3 LED37.3 LED38.3 LED39.3 LED40.3 LED41.3 LED42.3 LED43.3 LED44.3 LED45.3 LED46.3 LED47.3 LED48.3 LED49.3 LED50.3 LED51.3 LED52.3 LED53.3 LED54.3 LED55.3 LED56.3 LED57.3 LED58.3 LED59.3 LED60.3 LED61.3 LED62.3 LED63.3 LED64.3 LED65.3 LED66.3 LED67.3 LED68.3 LED69.3 LED70.3 LED71.3 LED72.3 LED73.3 LED74.3 LED75.3 LED76.3 LED77.3 LED78.3 LED79.3 LED80.3 LED81.3 LED82.3 LED83.3 LED84.3 LED85.3 LED86.3 LED87.3 LED88.3 LED89.3 LED90.3 LED91.3 LED92.3 LED93.3 LED94.3 LED95.3 LED96.3 LED97.3 LED98.3 LED99.3 LED100.3 LED101.3 LED102.3 LED103.3 LED104.3 LED105.3 LED106.3 LED107.3 LED108.3 LED109.3 LED110.3 LED111.3 LED112.3 LED113.3 LED114.3 LED115.3 LED116.3 LED117.3 LED118.3 LED119.3 LED120.3 LED121.3 LED122.3 LED123.3 LED124.3 LED125.3 LED126.3 LED127.3 LED128.3 LED129.3 U2.15 U3.13 U4.1 U4.4 | length 302.5
  Bottom Layer w15: C7.2 C8.2 ; U2.15 7118.98,5626.02 v1(7120,5625)
  Bottom Layer w25: C8.2 v1(6995,5925) C4.2
  other v1: 7608.91,4073.31 6096.65,5274.96 6825,5274.96 7328.34,6377.96
LED1_2: LED1.2 LED2.4 | length 444.6
  Top Layer w19.68: LED1.2 LED2.4
LED2_2: LED2.2 LED3.4 | length 444.6
  Top Layer w19.68: LED3.4 LED2.2
LED3_2: LED3.2 LED4.4 | length 444.6
  Top Layer w19.68: LED4.4 LED3.2
LED4_2: LED4.2 LED5.4 | length 444.6
  Top Layer w19.68: LED5.4 LED4.2
LED5_2: LED5.2 LED6.4 | length 444.6
  Top Layer w19.68: LED6.4 LED5.2
LED6_2: LED6.2 LED7.4 | length 444.6
  Top Layer w19.68: LED7.4 LED6.2
LED7_2: LED7.2 LED8.4 | length 444.6
  Top Layer w19.68: LED8.4 LED7.2
LED8_2: LED8.2 LED9.4 | length 444.6
  Top Layer w19.68: LED9.4 LED8.2
LED9_2: LED9.2 LED10.4 | length 444.6
  Top Layer w19.68: LED10.4 LED9.2
LED10_2: LED10.2 LED11.4 | length 444.6
  Top Layer w19.68: LED11.4 LED10.2@3940.89,7721.65
LED11_2: LED20.2 LED21.4 | length 444.6
  Top Layer w19.68: LED20.2 LED21.4
LED11_4: LED19.2 LED20.4 | length 444.6
  Top Layer w19.68: LED19.2 LED20.4
LED12_4: LED18.2 LED19.4 | length 444.6
  Top Layer w19.68: LED18.2 LED19.4
LED13_4: LED17.2 LED18.4 | length 444.6
  Top Layer w19.68: LED17.2 LED18.4
LED14_4: LED16.2 LED17.4 | length 444.6
  Top Layer w19.68: LED17.4 LED16.2
LED15_4: LED15.2 LED16.4 | length 444.6
  Top Layer w19.68: LED16.4 LED15.2
LED16_4: LED14.2 LED15.4 | length 444.6
  Top Layer w19.68: LED15.4 LED14.2
LED17_4: LED13.2 LED14.4 | length 444.6
  Top Layer w19.68: LED14.4 LED13.2
LED18_4: LED12.2 LED13.4 | length 444.6
  Top Layer w19.68: LED13.4 LED12.2
LED19_4: LED11.2 LED12.4 | length 444.6
  Top Layer w19.68: LED12.4 LED11.2
LED21_2: LED30.2 LED31.4 | length 433.5
  Top Layer w19.68: LED31.4 LED30.2
LED21_4: LED29.2 LED30.4 | length 444.6
  Top Layer w19.68: LED29.2 LED30.4
LED22_4: LED28.2 LED29.4 | length 444.6
  Top Layer w19.68: LED28.2 LED29.4
LED23_4: LED27.2 LED28.4 | length 444.6
  Top Layer w19.68: LED27.2 LED28.4
LED24_4: LED26.2 LED27.4 | length 444.6
  Top Layer w19.68: LED26.2 LED27.4
LED25_4: LED25.2 LED26.4 | length 444.6
  Top Layer w19.68: LED25.2@5909.11,2288.35 LED26.4
LED26_4: LED24.2 LED25.4 | length 444.6
  Top Layer w19.68: LED24.2 LED25.4
LED27_4: LED23.2 LED24.4 | length 444.6
  Top Layer w19.68: LED23.2 LED24.4
LED28_4: LED22.2 LED23.4 | length 444.6
  Top Layer w19.68: LED22.2 LED23.4
LED29_4: LED21.2 LED22.4 | length 444.6
  Top Layer w19.68: LED21.2 LED22.4
LED31_2: LED40.2 LED41.4 | length 440
  Top Layer w19.68: LED41.4 LED40.2
LED31_4: LED39.2 LED40.4 | length 440
  Top Layer w19.68: LED40.4 LED39.2
LED32_4: LED38.2 LED39.4 | length 440
  Top Layer w19.68: LED39.4 LED38.2
LED33_4: LED37.2 LED38.4 | length 440
  Top Layer w19.68: LED38.4 LED37.2
LED34_4: LED36.2 LED37.4 | length 440
  Top Layer w19.68: LED37.4@5490.24,7649.75 LED36.2
LED35_4: LED35.2 LED36.4 | length 440
  Top Layer w19.68: LED36.4 LED35.2
LED36_4: LED34.2 LED35.4 | length 440
  Top Layer w19.68: LED35.4 LED34.2
LED37_4: LED33.2 LED34.4 | length 440
  Top Layer w19.68: LED34.4 LED33.2
LED38_4: LED32.2 LED33.4 | length 440
  Top Layer w19.68: LED33.4 LED32.2@7406.28,5692.05
LED39_4: LED31.2 LED32.4 | length 440
  Top Layer w19.68: LED31.2 LED32.4
LED41_2: LED50.2 LED51.4 | length 440
  Top Layer w19.68: LED50.2 LED51.4
LED41_4: LED49.2 LED50.4 | length 440
  Top Layer w19.68: LED49.2 LED50.4
LED42_4: LED48.2 LED49.4 | length 440
  Top Layer w19.68: LED48.2 LED49.4
LED43_4: LED47.2 LED48.4 | length 440
  Top Layer w19.68: LED47.2 LED48.4
LED44_4: LED46.2 LED47.4 | length 440
  Top Layer w19.68: LED46.2 LED47.4
LED45_4: LED45.2 LED46.4 | length 440
  Top Layer w19.68: LED46.4 LED45.2
LED46_4: LED44.2 LED45.4 | length 440
  Top Layer w19.68: LED45.4 LED44.2
LED47_4: LED43.2 LED44.4 | length 440
  Top Layer w19.68: LED44.4 LED43.2
LED48_4: LED42.2 LED43.4 | length 440
  Top Layer w19.68: LED43.4 LED42.2
LED49_4: LED41.2 LED42.4 | length 440
  Top Layer w19.68: LED42.4 LED41.2
LED51_2: LED60.2 LED61.4 | length 309.6
  Top Layer w19.68: LED60.2 LED61.4
LED51_4: LED59.2 LED60.4 | length 350
  Top Layer w19.68: LED59.2 LED60.4
LED52_4: LED58.2 LED59.4 | length 350
  Top Layer w19.68: LED58.2 LED59.4
LED53_4: LED57.2 LED58.4 | length 1384.6
  Top Layer w19.68: LED58.4 6850,3475 LED57.2
LED54_4: LED56.2 LED57.4 | length 440
  Top Layer w19.68: LED56.2 LED57.4
LED55_4: LED55.2 LED56.4 | length 440
  Top Layer w19.68: LED55.2 LED56.4
LED56_4: LED54.2 LED55.4 | length 440
  Top Layer w19.68: LED54.2 LED55.4
LED57_4: LED53.2 LED54.4 | length 440
  Top Layer w19.68: LED53.2 LED54.4
LED58_4: LED52.2 LED53.4 | length 440
  Top Layer w19.68: LED52.2 LED53.4
LED59_4: LED51.2 LED52.4 | length 440
  Top Layer w19.68: LED51.2 LED52.4
LED61_2: LED70.2 LED71.4 | length 350
  Top Layer w19.68: LED71.4 LED70.2
LED61_4: LED69.2 LED70.4 | length 350
  Top Layer w19.68: LED70.4 LED69.2
LED62_4: LED68.2 LED69.4 | length 427.8
  Top Layer w19.68: LED69.4 LED68.2
LED63_4: LED67.2 LED68.4 | length 295.2
  Top Layer w19.68: 3870,6985 LED67.2
LED64_4: LED66.2 LED67.4 | length 350
  Top Layer w19.68: LED67.4 LED66.2
LED65_4: LED65.2 LED66.4 | length 350
  Top Layer w19.68: LED66.4 LED65.2
LED66_4: LED64.2 LED65.4 | length 1699.2
  Top Layer w10: LED65.4 LED65.4 5354.09,7318.21 5363.37,7319.67 5372.67,7321.06 5381.98,7322.36 5391.31,7323.59 5400.64,7324.74 5409.98,7325.81 5419.33,7326.79 5428.69,7327.7 5438.05,7328.53 5447.42,7329.28 5456.8,7329.95 5466.19,7330.54 5475.57,7331.05 5484.97,7331.48 5494.36,7331.83 5503.76,7332.1 5513.16,7332.3 5522.56,7332.41 5531.96,7332.44 5541.36,7332.39 5550.76,7332.26 5560.16,7332.05 5569.56,7331.76 5578.96,7331.39 5588.35,7330.94 5597.73,7330.41 5607.12,7329.8 5616.49,7329.11 5625.86,7328.34 5635.23,7327.5 5644.58,7326.57 5653.93,7325.56 5663.27,7324.47 5672.6,7323.31 5681.92,7322.06 5691.23,7320.74 5700.52,7319.33 5709.81,7317.85 5719.08,7316.29 5728.34,7314.65 5737.58,7312.93 5746.81,7311.13 5756.02,7309.25 5765.22,7307.3 5774.4,7305.26 5783.56,7303.15 5792.7,7300.96 5801.83,7298.7 5810.93,7296.35 5820.02,7293.93 5829.08,7291.43 5838.12,7288.86 5847.14,7286.2 5856.14,7283.47 5865.11,7280.67 5874.06,7277.78 5882.98,7274.83 5891.88,7271.79 5900.76,7268.68 5909.6,7265.5 5918.42,7262.24 5927.21,7258.9 5935.97,7255.49 5944.71,7252.01 5953.41,7248.45 5962.08,7244.82 5970.72,7241.11 5979.33,7237.33 5987.91,7233.48 5996.45,7229.55 6004.96,7225.56 6013.43,7221.49 6021.87,7217.34 6030.28,7213.13 6038.65,7208.84 6046.98,7204.49 6055.27,7200.06 6063.53,7195.56 6071.75,7191 6079.93,7186.36 6088.07,7181.65 6096.16,7176.88 6104.22,7172.03 6112.24,7167.12 6120.21,7162.14 6128.14,7157.09 6136.03,7151.97 6143.88,7146.79 6151.68,7141.54 6159.43,7136.23 6167.14,7130.85 6174.81,7125.4 6182.42,7119.89 6189.99,7114.31 6197.51,7108.67 6204.99,7102.97 6212.41,7097.2 6219.79,7091.37 6227.11,7085.47 6234.39,7079.52 6241.61,7073.5 6248.79,7067.42 6255.91,7061.28 6262.98,7055.09 6269.99,7048.83 6276.95,7042.51 6283.86,7036.13 6290.71,7029.69 6297.51,7023.2 6304.26,7016.65 6310.94,7010.04 6317.57,7003.37 6324.15,6996.65 6330.66,6989.87 6337.12,6983.04 6343.52,6976.15 6349.86,6969.21 6356.14,6962.21 6362.36,6955.16 6368.53,6948.06 6374.63,6940.91 6380.67,6933.7 6386.64,6926.45 6392.56,6919.14 6398.41,6911.78 6404.21,6904.38 6409.93,6896.92 6415.6,6889.42 6421.2,6881.87 6426.73,6874.27 6432.21,6866.62 6437.61,6858.93 6442.95,6851.19 6448.23,6843.41 6453.43,6835.58 6458.57,6827.71 6463.65,6819.79 6468.65,6811.83 6473.59,6803.83 6478.46,6795.79 6483.26,6787.71 6488,6779.58 6492.66,6771.42 6497.25,6763.21 6501.78,6754.97 6506.23,6746.69 6510.61,6738.37 6514.92,6730.02 6519.16,6721.63 6523.33,6713.2 6527.43,6704.74 6531.45,6696.24 6535.41,6687.71 6539.29,6679.15 6543.09,6670.55 6546.83,6661.92 6550.49,6653.26 6554.07,6644.57 6557.58,6635.85 6561.02,6627.1 6564.38,6618.32 6567.67,6609.51 6570.89,6600.67 6574.02,6591.81 6577.09,6582.92 6580.07,6574.01 6582.98,6565.07 6585.82,6556.1 6588.57,6547.11 6591.26,6538.1 6593.86,6529.07 6596.39,6520.01 6598.84,6510.93 6601.21,6501.84 6603.51,6492.72 6605.73,6483.58 6607.87,6474.43 6609.93,6465.26 6611.91,6456.07 LED64.2
LED67_4: LED63.2 LED64.4 | length 350
  Top Layer w19.68: LED64.4 LED63.2
LED68_4: LED62.2 LED63.4 | length 350
  Top Layer w19.68: LED62.2 LED63.4
LED69_4: LED61.2 LED62.4 | length 388.2
  Top Layer w19.68: LED61.2 LED62.4
LED71_2: LED80.2 LED81.4 | length 343.6
  Top Layer w19.68: LED80.2 LED81.4
LED71_4: LED79.2 LED80.4 | length 343.6
  Top Layer w19.68: LED79.2 LED80.4
LED72_4: LED78.2 LED79.4 | length 1849.3
  Top Layer w15: LED78.2 5564.48,2788.95 ccw(c5840.89,3341.03) LED79.4
LED73_4: LED77.2 LED78.4 | length 347
  Top Layer w19.68: LED77.2 LED78.4
LED74_4: LED76.2 LED77.4 | length 350
  Top Layer w19.68: LED76.2 LED77.4
LED75_4: LED75.2 LED76.4 | length 356.9
  Top Layer w19.68: LED75.2 LED76.4
LED76_4: LED74.2 LED75.4 | length 339.6
  Top Layer w19.68: LED74.2 LED75.4
LED77_4: LED73.2 LED74.4 | length 350
  Top Layer w19.68: LED73.2 LED74.4
LED78_4: LED72.2 LED73.4 | length 350
  Top Layer w19.68: LED72.2 LED73.4
LED79_4: LED71.2 LED72.4 | length 1542.9
  Top Layer w10: LED72.4 2680.1,4298.45 2674.47,4305.24 2668.9,4312.08 2663.39,4318.97 2657.95,4325.92 2652.57,4332.91 2647.25,4339.95 2642,4347.03 2636.81,4354.17 2631.69,4361.35 2626.63,4368.58 2621.64,4375.85 2616.72,4383.17 2611.86,4390.53 2607.07,4397.94 2602.34,4405.39 2597.68,4412.88 2593.09,4420.41 2588.57,4427.99 2584.12,4435.6 2579.74,4443.26 2575.43,4450.95 2571.19,4458.69 2567.01,4466.46 2562.91,4474.27 2558.88,4482.12 2554.92,4490 2551.03,4497.92 2547.22,4505.87 2543.47,4513.86 2539.8,4521.88 2536.21,4529.93 2532.68,4538.02 2529.23,4546.14 2525.85,4554.29 2522.55,4562.47 2519.32,4570.68 2516.17,4578.92 2513.09,4587.18 2510.08,4595.48 2507.15,4603.8 2504.3,4612.14 2501.52,4620.52 2498.82,4628.91 2496.19,4637.33 2493.64,4645.78 2491.17,4654.25 2488.77,4662.74 2486.46,4671.25 2484.22,4679.78 2482.05,4688.33 2479.97,4696.9 2477.96,4705.49 2476.03,4714.1 2474.17,4722.73 2472.4,4731.37 2470.71,4740.02 2469.09,4748.7 2467.55,4757.38 2466.09,4766.08 2464.71,4774.79 2463.41,4783.52 2462.19,4792.26 2461.04,4801 2459.98,4809.76 2459,4818.53 2458.09,4827.3 2457.27,4836.08 2456.52,4844.87 2455.86,4853.67 2455.27,4862.47 2454.77,4871.28 2454.34,4880.09 2453.99,4888.9 2453.73,4897.72 2453.54,4906.54 2453.44,4915.36 2453.41,4924.18 2453.46,4933 2453.6,4941.82 2453.81,4950.64 2454.11,4959.46 2454.48,4968.27 2454.93,4977.08 2455.47,4985.89 2456.08,4994.69 2456.77,5003.48 2457.55,5012.27 2458.4,5021.05 2459.33,5029.82 2460.34,5038.58 2461.43,5047.34 2462.6,5056.08 2463.85,5064.81 2465.18,5073.53 2466.59,5082.24 2468.08,5090.94 2469.64,5099.62 2471.29,5108.29 2473.01,5116.94 2474.81,5125.57 2476.69,5134.19 2478.65,5142.79 2480.68,5151.38 2482.8,5159.94 2484.99,5168.49 2487.26,5177.01 2489.6,5185.52 2492.02,5194 2494.52,5202.46 2497.1,5210.89 2499.75,5219.31 2502.48,5227.7 2505.28,5236.06 2508.16,5244.4 2511.12,5252.71 2514.15,5260.99 2517.26,5269.25 2520.44,5277.48 2523.69,5285.68 2527.02,5293.85 2530.42,5301.98 2533.9,5310.09 2537.45,5318.17 2541.07,5326.21 2544.77,5334.22 2548.54,5342.2 2552.38,5350.14 2556.29,5358.04 2560.28,5365.91 2564.33,5373.75 2568.46,5381.54 2572.66,5389.3 2576.92,5397.02 2581.26,5404.71 2585.67,5412.35 2590.14,5419.95 2594.69,5427.51 2599.3,5435.03 2603.98,5442.51 2608.73,5449.94 2613.54,5457.33 2618.42,5464.68 2623.37,5471.98 2628.39,5479.24 2633.47,5486.45 2638.61,5493.62 2643.82,5500.73 2649.1,5507.8 2654.44,5514.83 2659.84,5521.8 2665.3,5528.73 2670.83,5535.6 2676.42,5542.42 2682.07,5549.2 2687.79,5555.92 2693.56,5562.59 2699.39,5569.21 2705.29,5575.77 2711.24,5582.28 2717.25,5588.74 2723.32,5595.14 2729.45,5601.48 2735.63,5607.77 2741.87,5614.01 2748.17,5620.18 2754.53,5626.3 2760.93,5632.37 2767.4,5638.37 2773.92,5644.31 2780.49,5650.2 2787.11,5656.02 2793.79,5661.79 2800.52,5667.49 LED71.2
LED81_2: LED90.2 LED91.4 | length 1485
  Top Layer w19.68: LED91.4 3160,4480 ccw(c2927.6,5013.19) LED90.2
LED81_4: LED89.2 LED90.4 | length 343.6
  Top Layer w19.68: LED90.4@3121.15,5764.19 LED89.2
LED82_4: LED88.2 LED89.4 | length 343.6
  Top Layer w19.68: LED89.4 LED88.2
LED83_4: LED87.2 LED88.4 | length 343.6
  Top Layer w19.68: LED88.4 LED87.2
LED84_4: LED86.2 LED87.4 | length 343.6
  Top Layer w19.68: LED87.4 LED86.2
LED85_4: LED85.2 LED86.4 | length 343.6
  Top Layer w19.68: LED86.4 LED85.2
LED86_4: LED84.2 LED85.4 | length 1549.2
  Top Layer w19.68: LED85.4 5279.59,6930.41 5355,6855 ccw(c6003.1,6767.72) LED84.2
LED87_4: LED83.2 LED84.4 | length 343.6
  Top Layer w19.68: LED84.4 LED83.2
LED88_4: LED82.2 LED83.4 | length 343.6
  Top Layer w19.68: LED82.2 LED83.4
LED89_4: LED81.2 LED82.4 | length 343.6
  Top Layer w19.68: LED81.2 LED82.4
LED91_2: LED100.2 LED101.4 | length 329.5
  Top Layer w19.68: LED101.4 LED100.2
LED91_4: LED99.2 LED100.4 | length 329.5
  Top Layer w19.68: LED99.2 LED100.4
LED92_4: LED98.2 LED99.4 | length 329.5
  Top Layer w19.68: LED98.2 LED99.4
LED93_4: LED97.2 LED98.4 | length 329.5
  Top Layer w19.68: LED97.2 LED98.4
LED94_4: LED96.2 LED97.4 | length 1100
  Top Layer w10: LED96.2 5337.28,3229.27 5337.99,3237.06 5338.78,3244.85 5339.65,3252.62 5340.6,3260.39 5341.63,3268.15 5342.74,3275.89 5343.93,3283.62 5345.19,3291.34 5346.54,3299.05 5347.96,3306.75 5349.47,3314.42 5351.05,3322.09 5352.71,3329.73 5354.45,3337.36 5356.26,3344.97 5358.15,3352.56 5360.12,3360.13 5362.17,3367.69 5364.3,3375.21 5366.5,3382.72 5368.78,3390.21 5371.13,3397.67 5373.57,3405.11 5376.07,3412.52 5378.66,3419.9 5381.31,3427.26 5384.05,3434.59 5386.86,3441.89 5389.74,3449.17 5392.69,3456.41 5395.73,3463.62 5398.83,3470.81 5402.01,3477.96 5405.26,3485.07 5408.58,3492.16 5411.98,3499.2 5415.44,3506.22 5418.98,3513.2 5422.59,3520.14 5426.27,3527.04 5430.02,3533.91 5433.85,3540.73 5437.74,3547.52 5441.7,3554.27 5445.73,3560.98 5449.82,3567.64 5453.99,3574.27 5458.22,3580.85 5462.52,3587.38 5466.89,3593.87 5471.32,3600.32 5475.82,3606.72 5480.38,3613.08 5485.01,3619.39 5489.7,3625.65 5494.46,3631.86 5499.28,3638.02 5504.16,3644.14 5509.1,3650.2 5514.11,3656.21 5519.18,3662.17 5524.3,3668.08 5529.49,3673.94 5534.74,3679.74 5540.05,3685.49 5545.41,3691.19 5550.84,3696.83 5556.32,3702.41 5561.85,3707.94 5567.45,3713.41 5573.1,3718.82 5578.8,3724.17 5584.56,3729.47 5590.37,3734.71 5596.24,3739.88 5602.16,3745 5608.13,3750.06 5614.15,3755.05 5620.22,3759.99 5626.35,3764.86 5632.52,3769.67 5638.74,3774.41 5645.01,3779.09 5651.33,3783.71 5657.69,3788.26 5664.1,3792.74 5670.56,3797.17 5677.06,3801.52 5683.6,3805.81 5690.19,3810.03 5696.82,3814.18 5703.49,3818.26 5710.21,3822.28 5716.96,3826.23 5723.76,3830.11 5730.59,3833.92 5737.46,3837.65 5744.38,3841.32 5751.32,3844.92 5758.31,3848.44 5765.33,3851.9 5772.38,3855.28 5779.47,3858.59 5786.59,3861.83 5793.75,3864.99 5800.94,3868.08 5808.16,3871.1 5815.41,3874.04 5822.68,3876.91 5829.99,3879.71 5837.33,3882.43 5844.69,3885.07 5852.08,3887.64 5859.5,3890.14 5866.94,3892.55 5874.4,3894.89 5881.89,3897.16 5889.4,3899.35 5896.94,3901.46 5904.49,3903.49 5912.07,3905.45 5919.66,3907.33 5927.28,3909.13 5934.91,3910.85 5942.56,3912.5 5950.22,3914.07 5957.9,3915.55 5965.6,3916.96 5973.31,3918.3 5981.03,3919.55 5988.77,3920.72 5996.52,3921.82 6004.27,3922.83 6012.04,3923.77 6019.82,3924.62 6027.6,3925.4 6035.4,3926.09 6043.2,3926.71 6051,3927.25 LED97.4
LED95_4: LED95.2 LED96.4 | length 343.6
  Top Layer w19.68: LED95.2 LED96.4
LED96_4: LED94.2 LED95.4 | length 343.6
  Top Layer w19.68: LED94.2 LED95.4
LED97_4: LED93.2 LED94.4 | length 343.6
  Top Layer w19.68: LED93.2 LED94.4
LED98_4: LED92.2 LED93.4 | length 343.6
  Top Layer w19.68: LED92.2 LED93.4@3684.75,3491.05
LED99_4: LED91.2 LED92.4 | length 343.6
  Top Layer w19.68: LED91.2 LED92.4
LED101_2: LED110.2 LED111.4 | length 329.5
  Top Layer w19.68: LED110.2 LED111.4
LED101_4: LED109.2 LED110.4 | length 329.5
  Top Layer w19.68: LED109.2 LED110.4
LED102_4: LED108.2 LED109.4 | length 329.5
  Top Layer w19.68: LED108.2 LED109.4@4072.36,3693.85
LED103_4: LED107.2 LED108.4 | length 329.5
  Top Layer w19.68: LED107.2 LED108.4@3691.95,4042.88
LED104_4: LED106.2 LED107.4 | length 956.7
  Top Layer w10: LED107.4 3450.21,4509.54 3454.44,4522.38 3458.61,4535.23 3462.7,4548.12 3466.71,4561.02 3470.64,4573.95 3474.5,4586.91 3478.28,4599.88 3481.98,4612.88 3485.61,4625.9 3489.16,4638.94 3492.63,4652 3496.03,4665.08 3499.35,4678.18 3502.59,4691.3 3505.75,4704.44 3508.83,4717.6 3511.84,4730.78 3514.77,4743.97 3517.62,4757.18 3520.39,4770.41 3523.08,4783.65 3525.7,4796.91 3528.24,4810.19 3530.7,4823.48 3533.07,4836.78 3535.38,4850.1 3537.6,4863.43 3539.74,4876.77 3541.8,4890.13 3543.79,4903.5 3545.69,4916.88 3547.52,4930.27 3549.27,4943.67 3550.94,4957.08 3552.52,4970.5 3554.03,4983.93 3555.46,4997.37 3556.81,5010.82 3558.08,5024.28 3559.27,5037.74 3560.38,5051.21 3561.42,5064.68 3562.37,5078.16 3563.24,5091.65 3564.03,5105.14 3564.74,5118.64 3565.37,5132.14 3565.93,5145.64 3566.4,5159.15 3566.79,5172.66 3567.1,5186.17 3567.33,5199.68 3567.49,5213.2 3567.56,5226.71 3567.55,5240.23 3567.46,5253.74 3567.29,5267.26 3567.05,5280.77 3566.72,5294.28 3566.31,5307.79 3565.82,5321.29 3565.25,5334.8 3564.61,5348.3 3563.88,5361.79 3563.07,5375.28 3562.18,5388.77 3561.22,5402.25 3560.17,5415.72 3559.04,5429.19 3558.1,5439.75 LED106.2
LED105_4: LED105.2 LED106.4 | length 329.5
  Top Layer w19.68: LED106.4 LED105.2
LED106_4: LED104.2 LED105.4 | length 329.5
  Top Layer w19.68: LED105.4@3800.63,6092.15 LED104.2@4115.55,6189.13
LED107_4: LED103.2 LED104.4 | length 329.5
  Top Layer w19.68: LED104.4 LED103.2
LED108_4: LED102.2 LED103.4 | length 329.5
  Top Layer w19.68: LED103.4 LED102.2@5016.17,6436.45
LED109_4: LED101.2 LED102.4 | length 1032
  Top Layer w10: LED102.4 5230.23,6530.94 5236.15,6521.83 5242.14,6512.78 5248.19,6503.76 5254.31,6494.8 5260.49,6485.87 5266.74,6477 5273.05,6468.17 5279.43,6459.38 5285.88,6450.65 5292.39,6441.96 5298.96,6433.32 5305.59,6424.72 5312.29,6416.18 5319.05,6407.69 5325.88,6399.24 5332.76,6390.85 5339.71,6382.51 5346.72,6374.22 5353.79,6365.98 5360.92,6357.8 5368.11,6349.66 5375.36,6341.58 5382.67,6333.56 5390.04,6325.58 5397.47,6317.67 5404.95,6309.8 5412.49,6301.99 5420.09,6294.24 5427.75,6286.55 5435.47,6278.91 5443.23,6271.33 5451.06,6263.8 5458.94,6256.34 5466.88,6248.93 5474.87,6241.58 5482.91,6234.29 5491.01,6227.06 5499.16,6219.89 5507.36,6212.77 5515.62,6205.72 5523.92,6198.73 5532.28,6191.81 5540.69,6184.94 5549.15,6178.14 5557.66,6171.4 5566.22,6164.72 5574.82,6158.1 5583.48,6151.55 5592.19,6145.06 5600.94,6138.64 5609.74,6132.28 5618.58,6125.99 5627.47,6119.76 5636.41,6113.6 5645.39,6107.5 5654.42,6101.47 5663.49,6095.51 5672.61,6089.61 5681.76,6083.78 5690.97,6078.02 5700.21,6072.32 5709.49,6066.7 5718.82,6061.14 5728.19,6055.65 5737.59,6050.24 5747.04,6044.89 5756.53,6039.61 5766.05,6034.4 5775.61,6029.26 5785.21,6024.19 5794.85,6019.19 5804.52,6014.27 5814.23,6009.41 5823.98,6004.63 5833.76,5999.92 5843.58,5995.28 5853.42,5990.71 5863.31,5986.22 5873.22,5981.79 5883.17,5977.45 5893.15,5973.17 5903.16,5968.97 5913.2,5964.84 5923.27,5960.79 5933.37,5956.81 5943.5,5952.91 5953.66,5949.08 5963.84,5945.33 5974.06,5941.65 5984.3,5938.04 5994.57,5934.51 6004.86,5931.06 6015.18,5927.69 6025.52,5924.38 LED101.2
LED111_2: LED120.2 LED121.4 | length 231.4
  Top Layer w19.68: LED121.4 LED120.2@5010.15,6043.39
LED111_4: LED119.2 LED120.4 | length 231.4
  Top Layer w19.68: LED120.4 LED119.2
LED112_4: LED118.2 LED119.4 | length 231.4
  Top Layer w19.68: LED119.4 LED118.2
LED113_4: LED117.2 LED118.4 | length 231.4
  Top Layer w19.68: LED117.2@5866.85,5450.45 LED118.4
LED114_4: LED116.2 LED117.4 | length 231.4
  Top Layer w19.68: LED116.2 LED117.4
LED115_4: LED115.2 LED116.4 | length 231.4
  Top Layer w19.68: LED115.2 LED116.4
LED116_4: LED114.2 LED115.4 | length 231.4
  Top Layer w19.68: LED114.2 LED115.4
LED117_4: LED113.2 LED114.4 | length 231.4
  Top Layer w19.68: LED113.2 LED114.4
LED118_4: LED112.2 LED113.4 | length 231.4
  Top Layer w19.68: LED112.2 LED113.4
LED119_4: LED111.2 LED112.4 | length 307.9
  Top Layer w19.68: LED112.4 LED111.2
LED121_2: LED129.2
LED121_4: LED128.2 LED129.4 | length 231.4
  Top Layer w19.68: LED128.2 LED129.4
LED122_4: LED127.2 LED128.4 | length 231.4
  Top Layer w19.68: LED127.2 LED128.4
LED123_4: LED126.2 LED127.4 | length 231.4
  Top Layer w19.68: LED127.4 LED126.2
LED124_4: LED125.2 LED126.4 | length 231.4
  Top Layer w19.68: LED126.4 LED125.2
LED125_4: LED124.2 LED125.4 | length 231.4
  Top Layer w19.68: LED125.4 LED124.2
LED126_4: LED123.2 LED124.4 | length 231.4
  Top Layer w19.68: LED124.4 LED123.2
LED127_4: LED122.2 LED123.4 | length 231.4
  Top Layer w19.68: LED123.4 LED122.2
LED128_4: LED121.2 LED122.4 | length 231.4
  Top Layer w19.68: LED122.4 LED121.2
R1_1: R1.1 U2.14 | length 139
  Bottom Layer w10: U2.14 7152.48,5651.61 R1.1
R3_1: R3.1 U2.13 | length 149.8
  Bottom Layer w10: U2.13 7126.3,5677.21 R3.1
RS232_RX: CN1.2 R3.2 | length 423.8
  Bottom Layer w10: R3.2 7218.41,5734.79 CN1.2
RS232_TX: CN1.3 R1.2 | length 595.5
  Bottom Layer w10: R1.2 7200,5645 7190,5655 7190,5839.69 CN1.3
RX0: U2.12 U3.8 | length 1691.6
  Bottom Layer w10: U2.12 6989.64,5702.8 6774.53,5487.69 6774.53,4690.04 U3.8
S$109: 
TX1: U2.11 U3.7 | length 2238.5
  Bottom Layer w10: U3.7 6922.56,4433.2 6757.46,4598.3 6757.46,5493.41 6992.44,5728.39 U2.11
U2_7: U2.7
U2_8: U2.8
U2_9: U2.9
U2_10: U2.10
U3_1: U3.1
U3_2: U3.2
U3_3: U3.3
U3_4: U3.4
U3_5: U3.5
U3_9: U3.9
U3_10: U3.10
U3_11: U3.11
VCC: CN1.1 U4.2 | length 1230.3
  Bottom Layer w25: U4.2 7368.18,5503.18 ccw(c6519.33,6102.86) CN1.1

## Polygon pours and split planes (outlines as drawn)
GND on Top Layer (solid): 1520,8300 1520,1520 1500,1500 8065,1500 8160,1595 8160,8175 7870,8465
5V on Bottom Layer (solid): 1570,8275 1810,1715 8270,1615 8070,8405

## Keep-outs
Keep-Out Layer:
  circle w10 net S$109: c4925,5005 r3149.61

## Text inside footprints (layer, text, board x,y; h text height)
CN1: Bottom Overlay "*" at 7586.79,5825.99 h80 r355